# Altium PCB PCB1.PcbDoc
Units mil, origin at the board's own origin, x right, y up, seen from the top; angles counter-clockwise.
Board outline 1500 x 1600 mil, 8 copper layers (Top Layer, GND1, Signal Layer 1, POWER1, POWER2, Signal Layer 2, GND2, Bottom Layer), stack 66.301 mil thick; 43 components, 39 nets, 230 pads, 4 vias.
Unrouted connection lines stored in the file: 119.
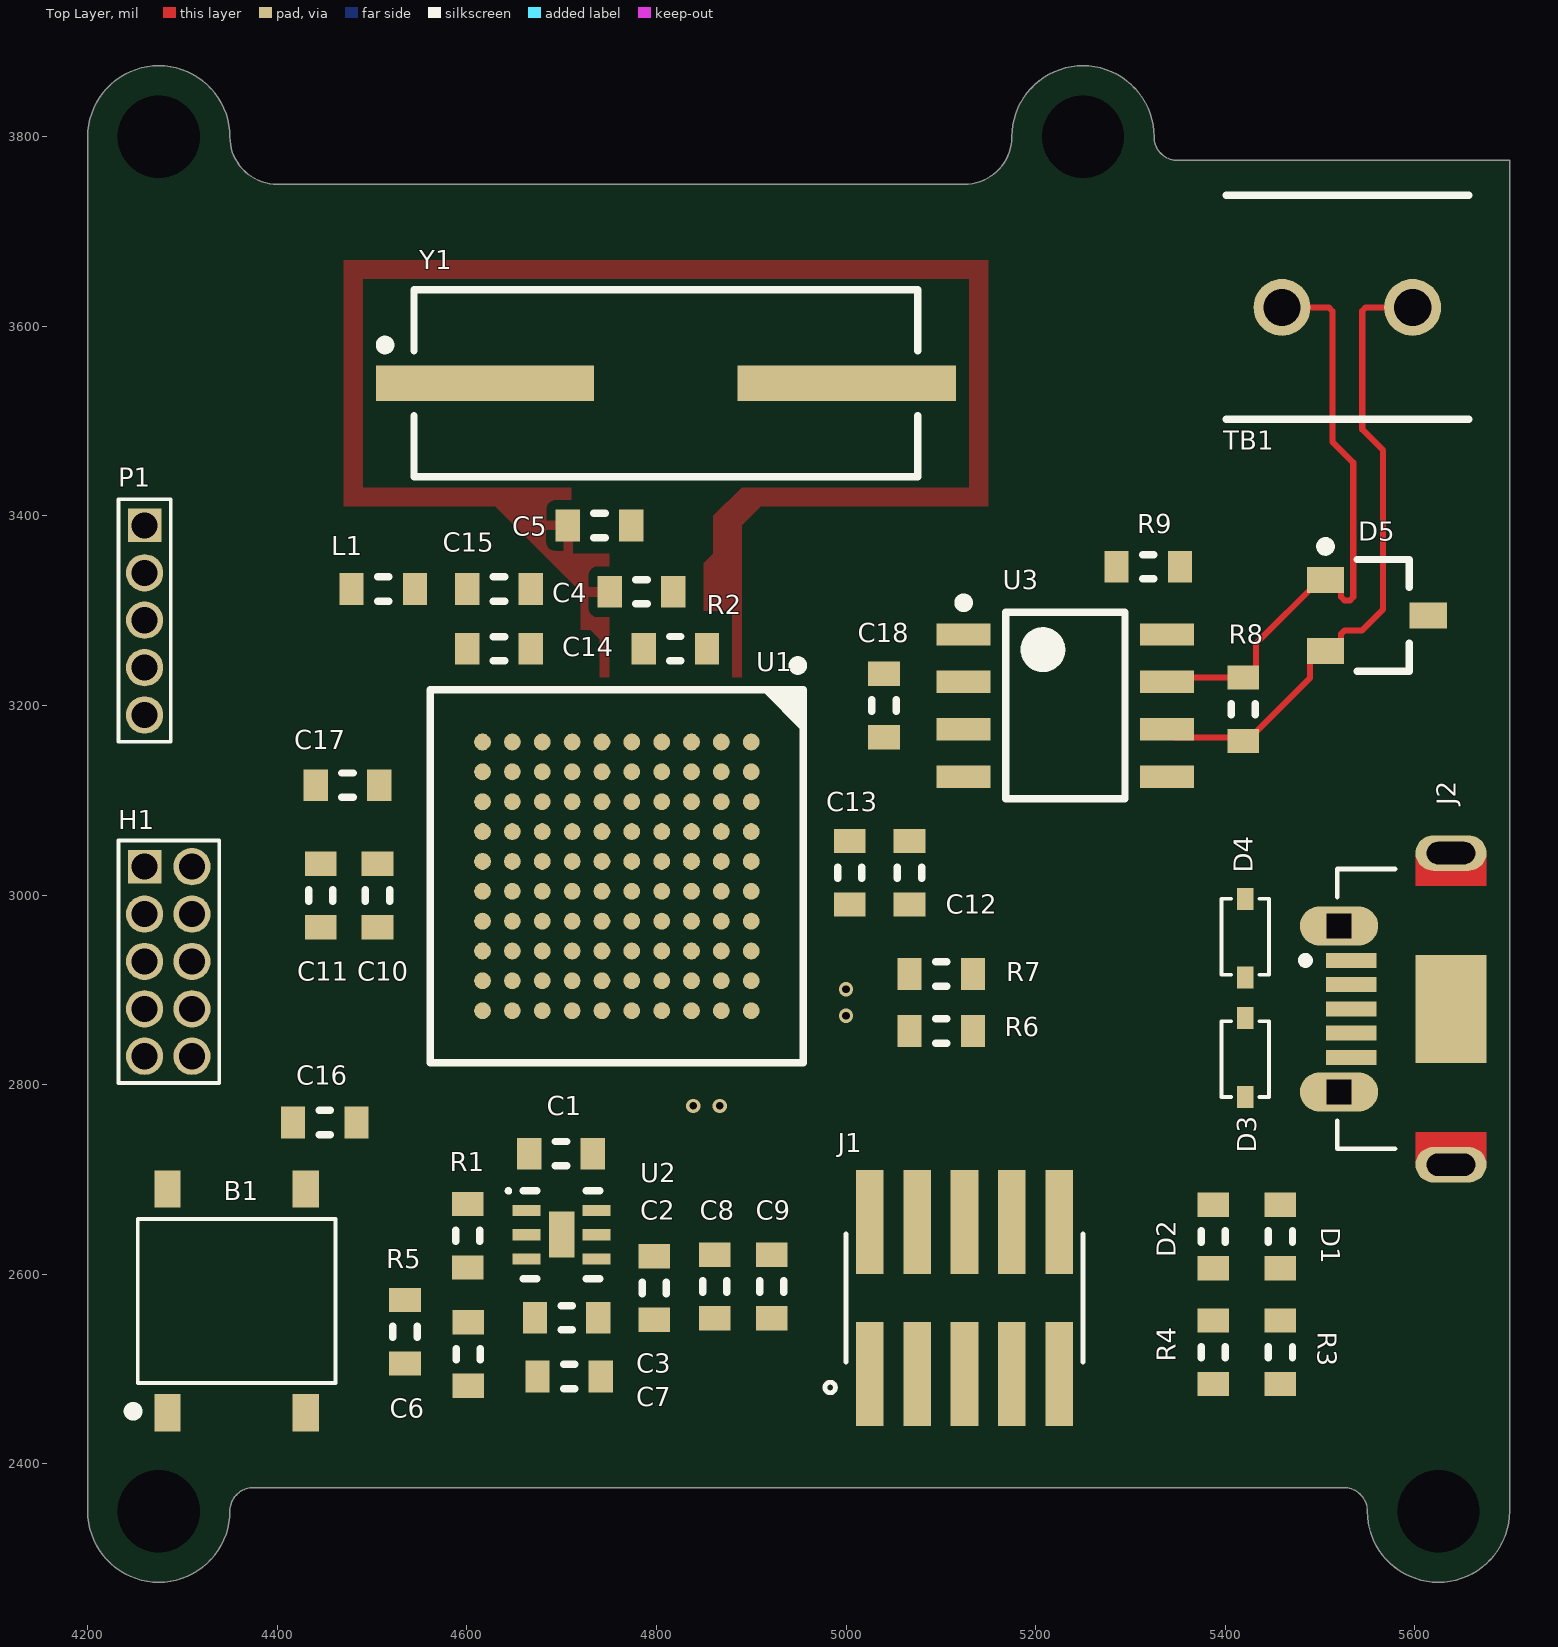
[diagram p0: Top Layer view]
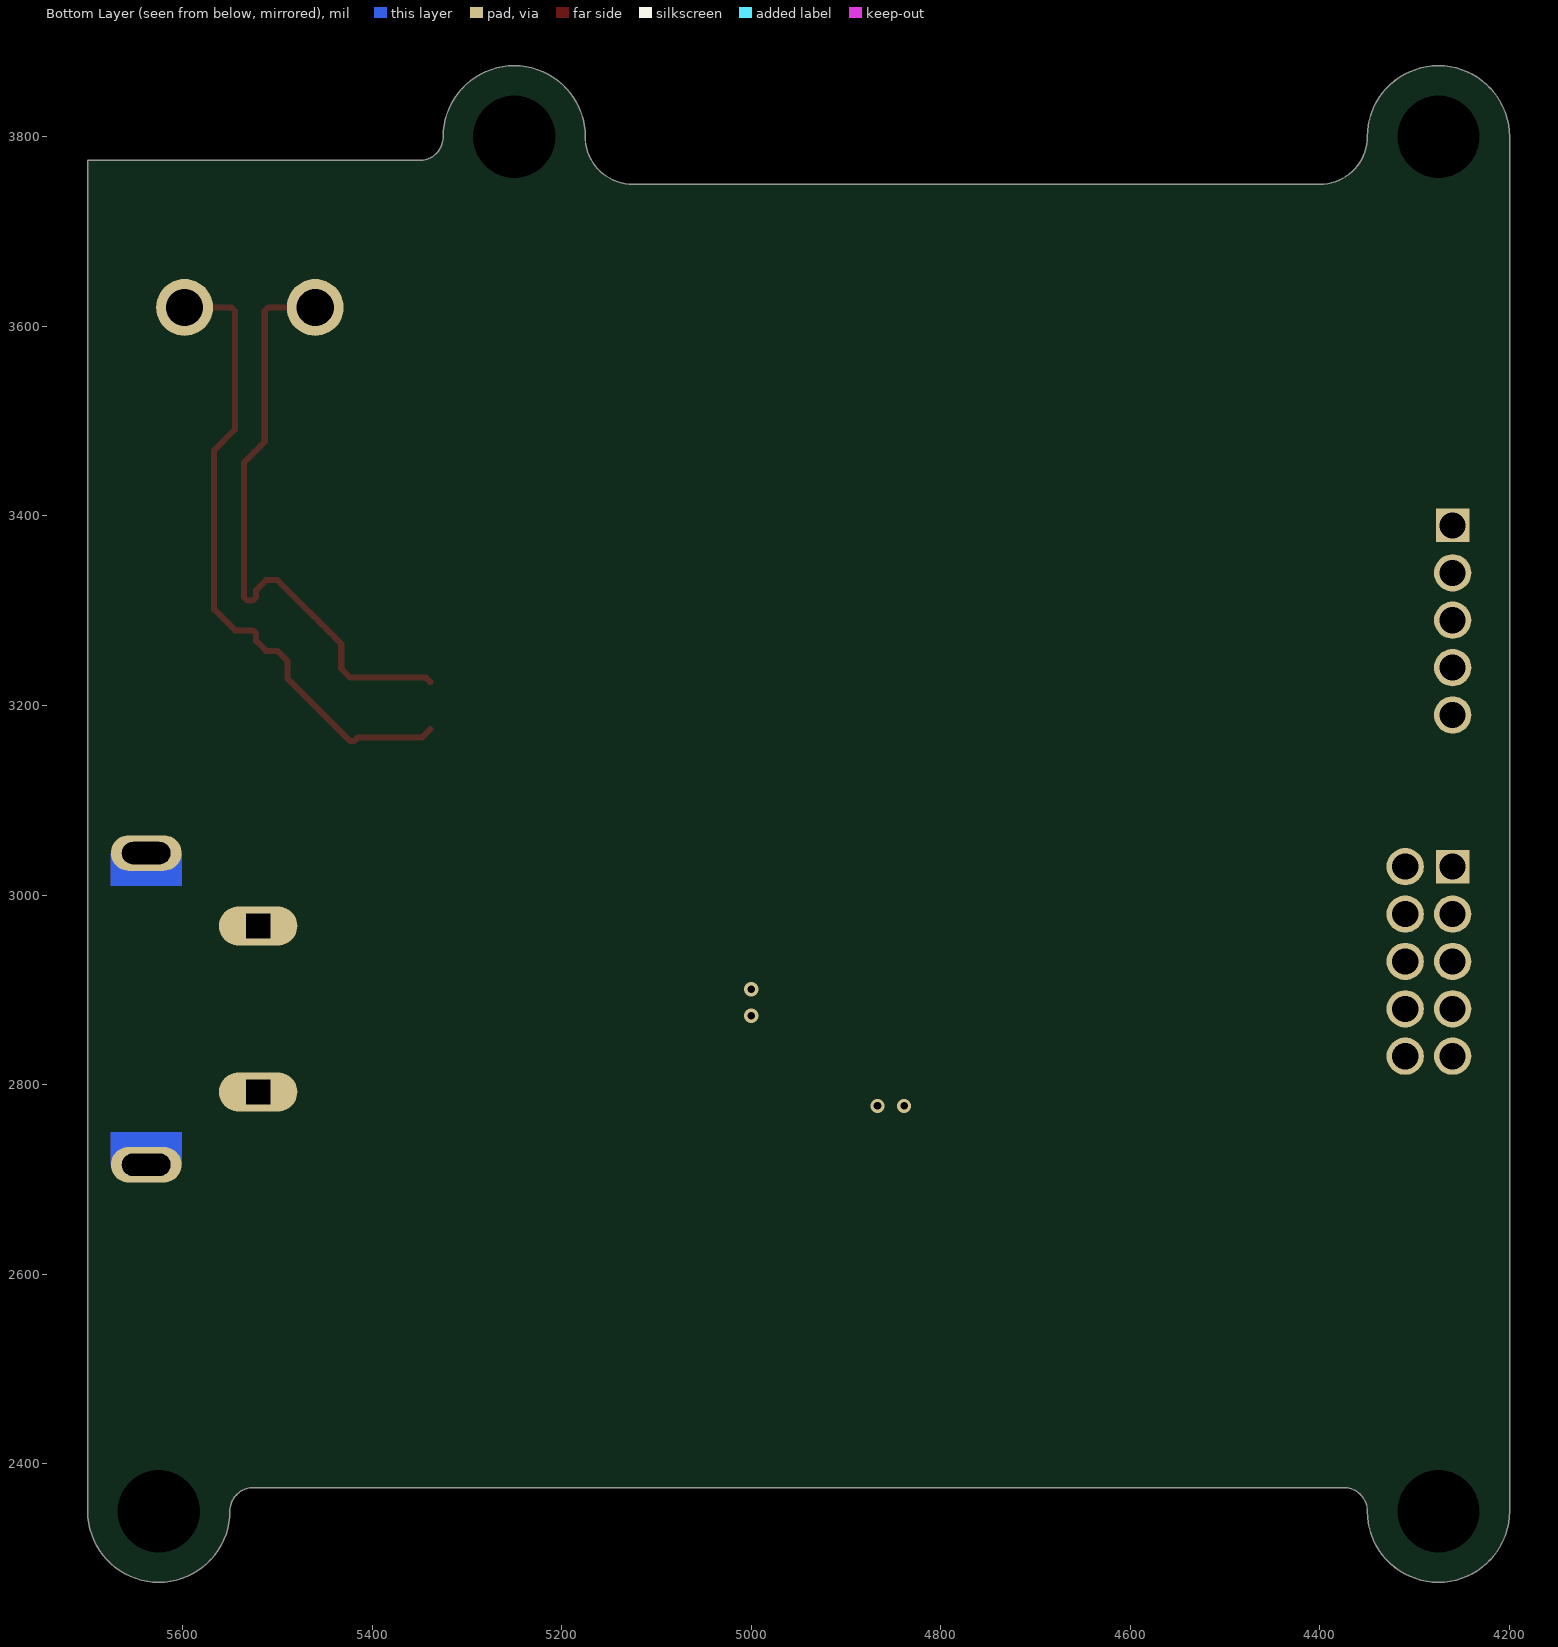
[diagram p1: Bottom Layer view, seen from below]
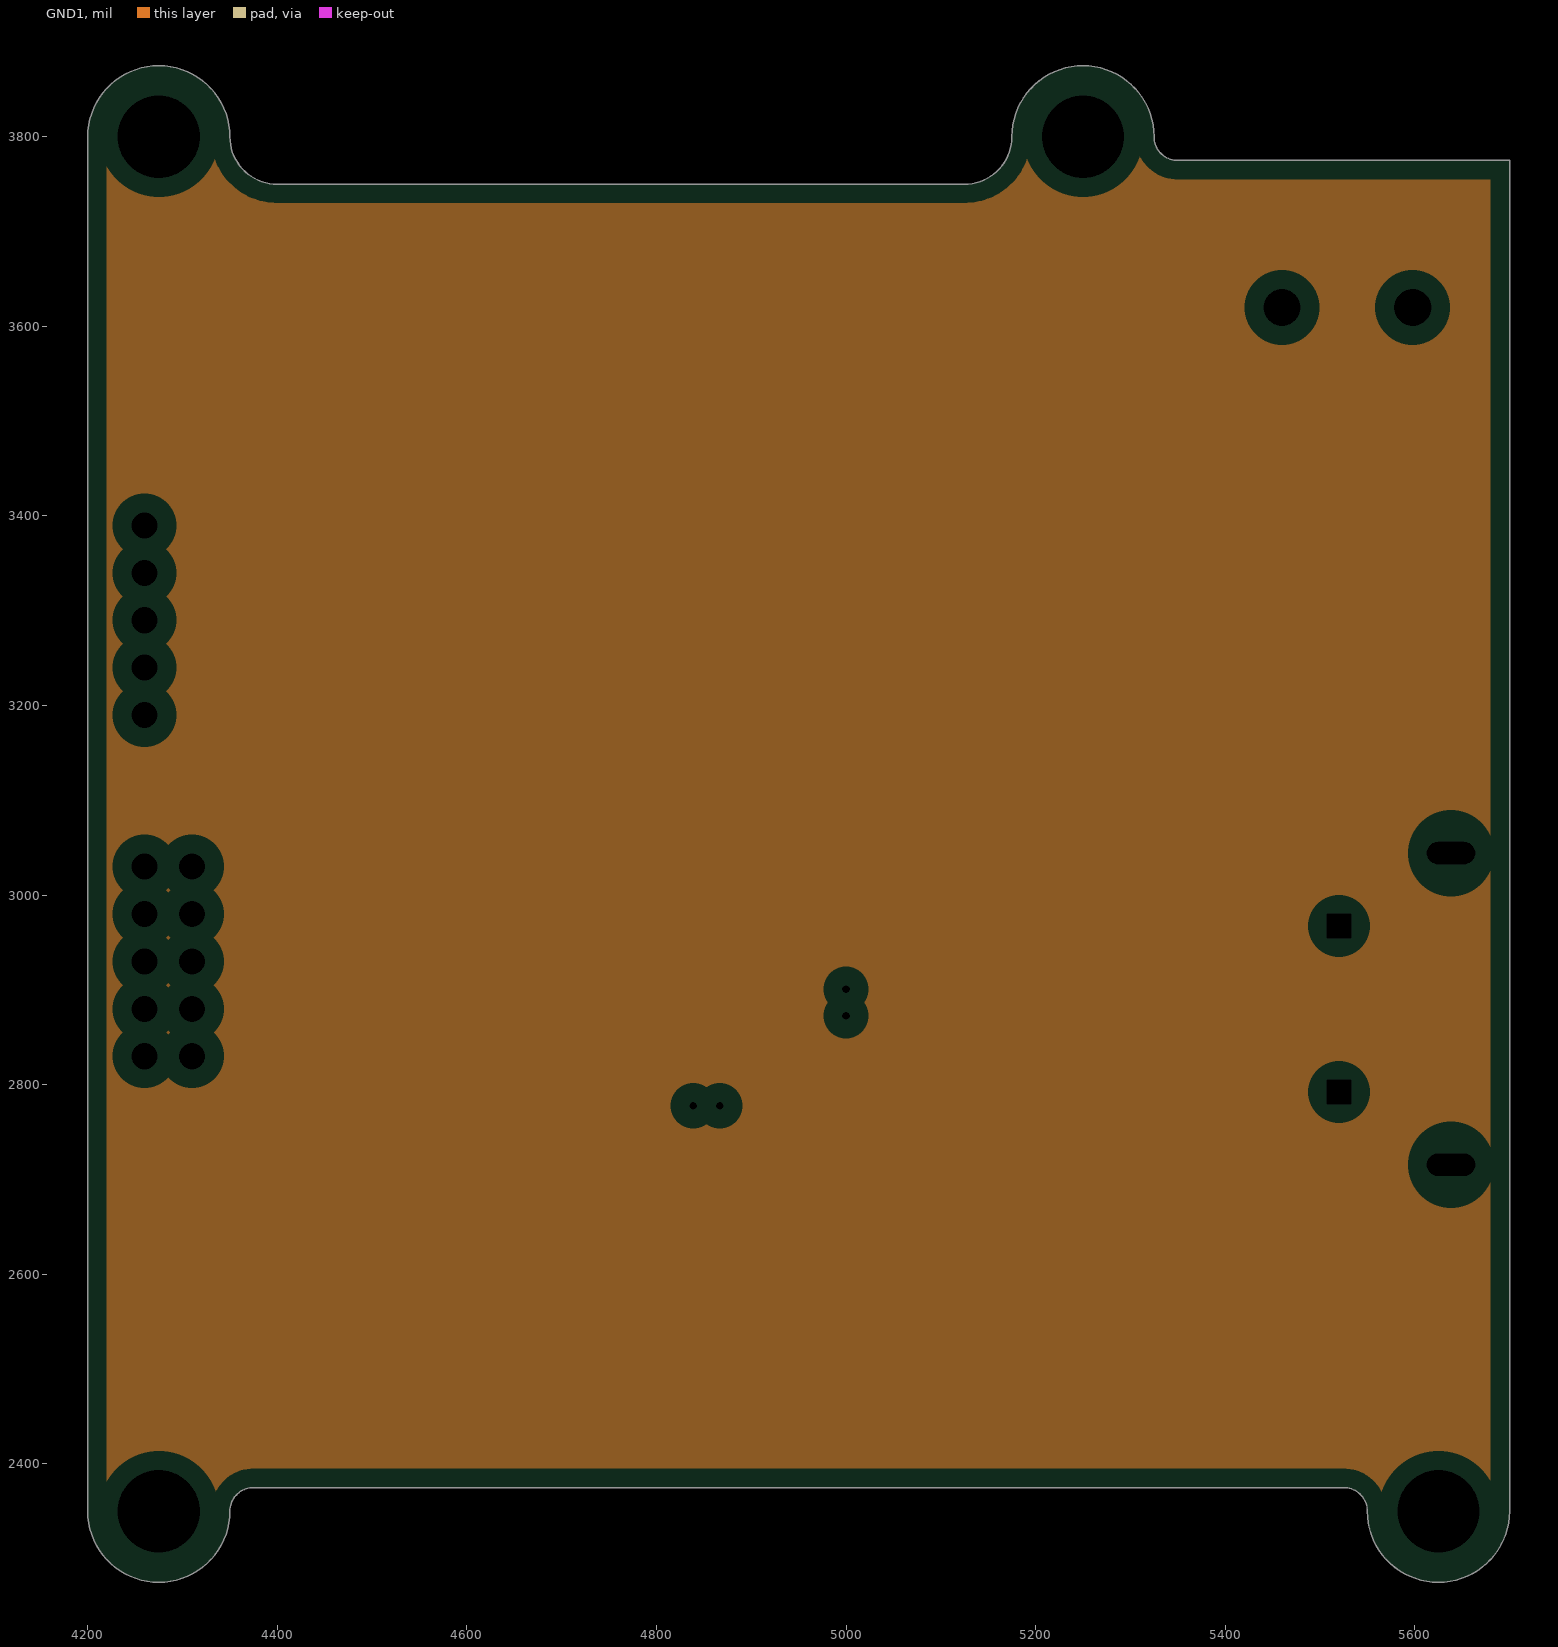
[diagram p2: GND1, clearances drawn from the general rule]
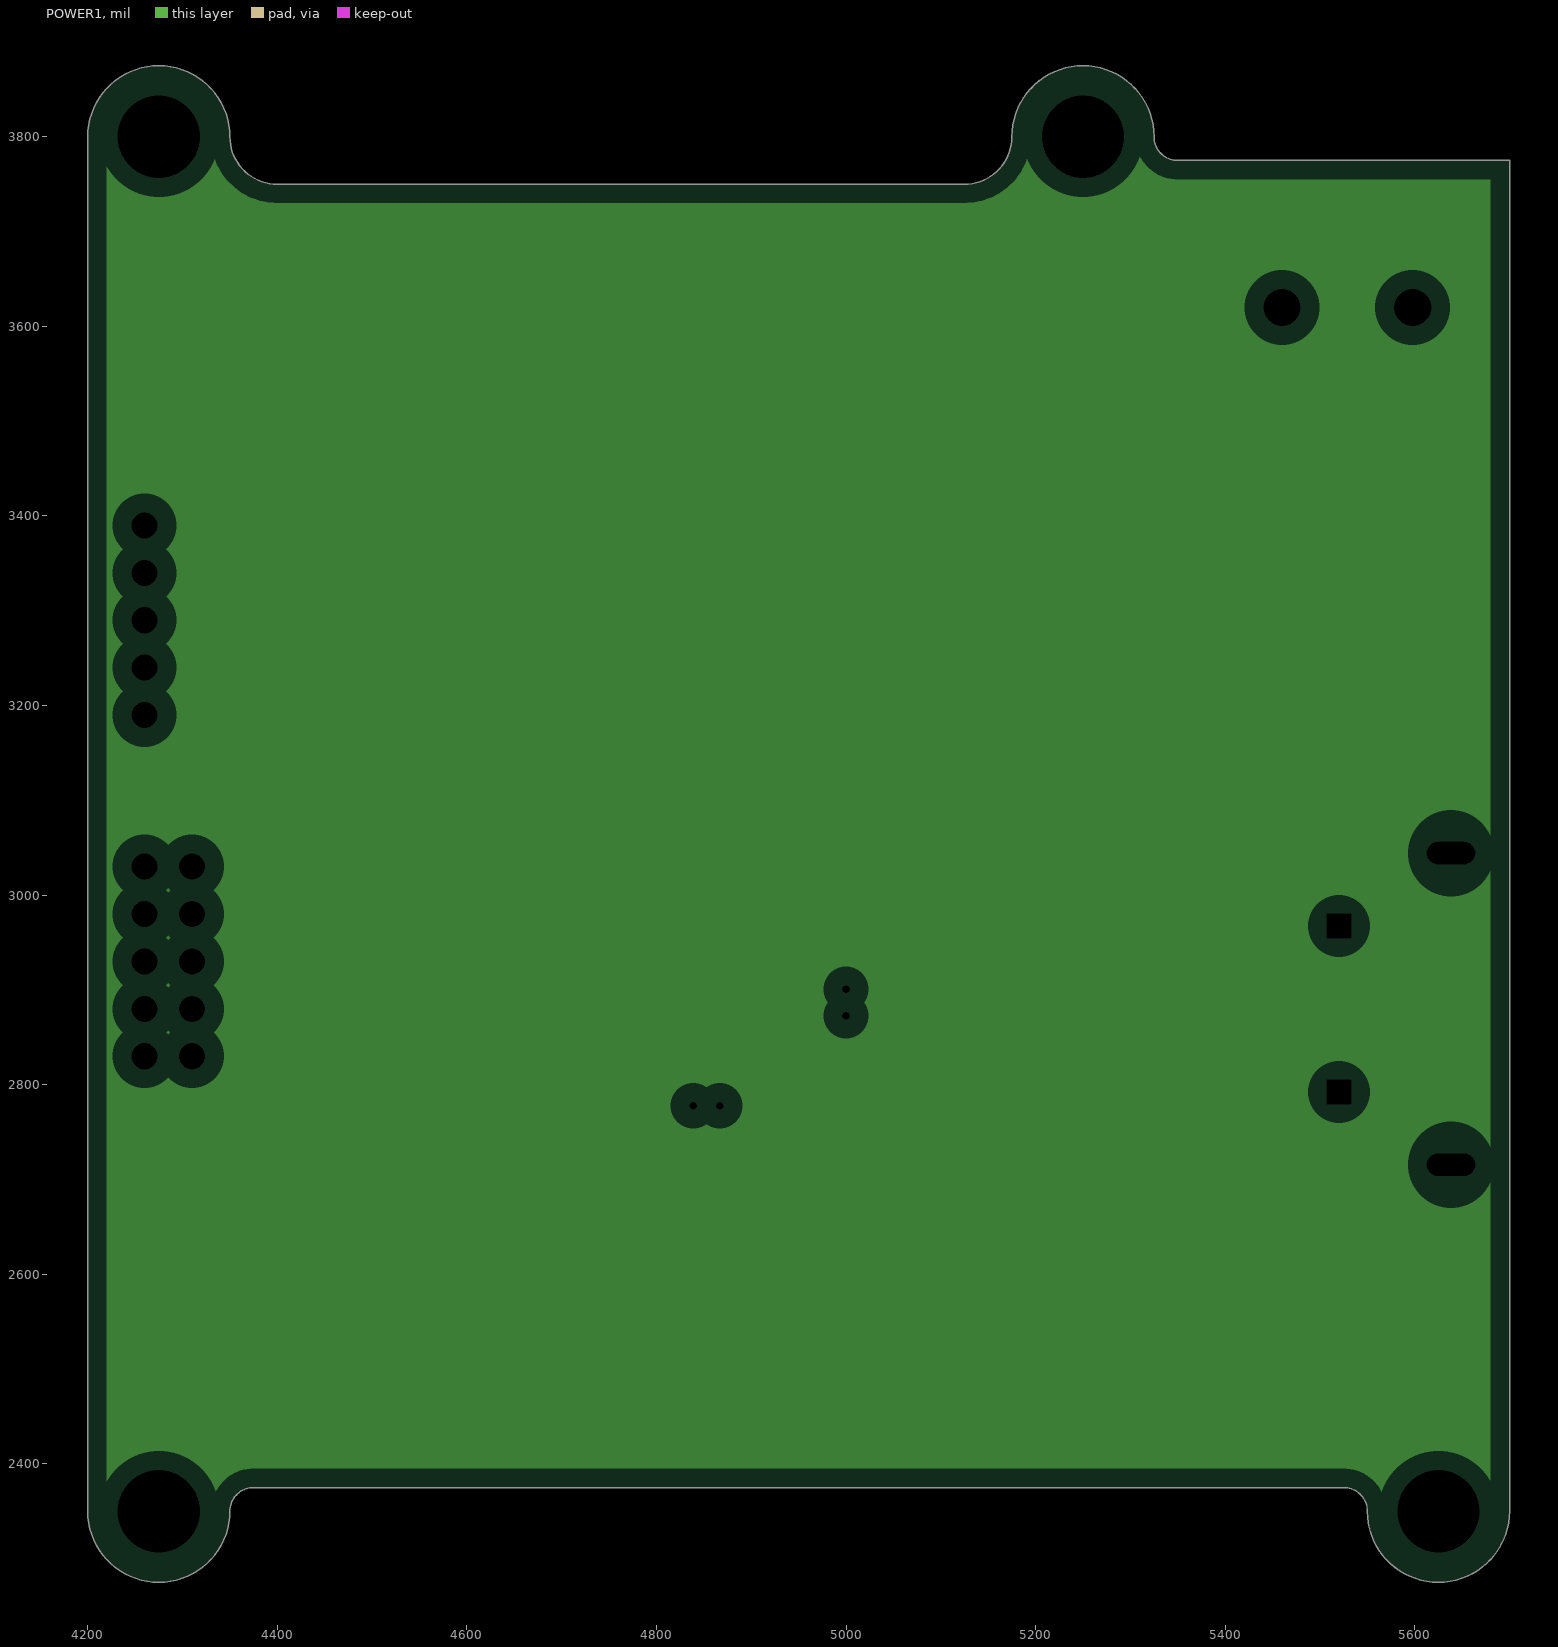
[diagram p3: POWER1, clearances drawn from the general rule]
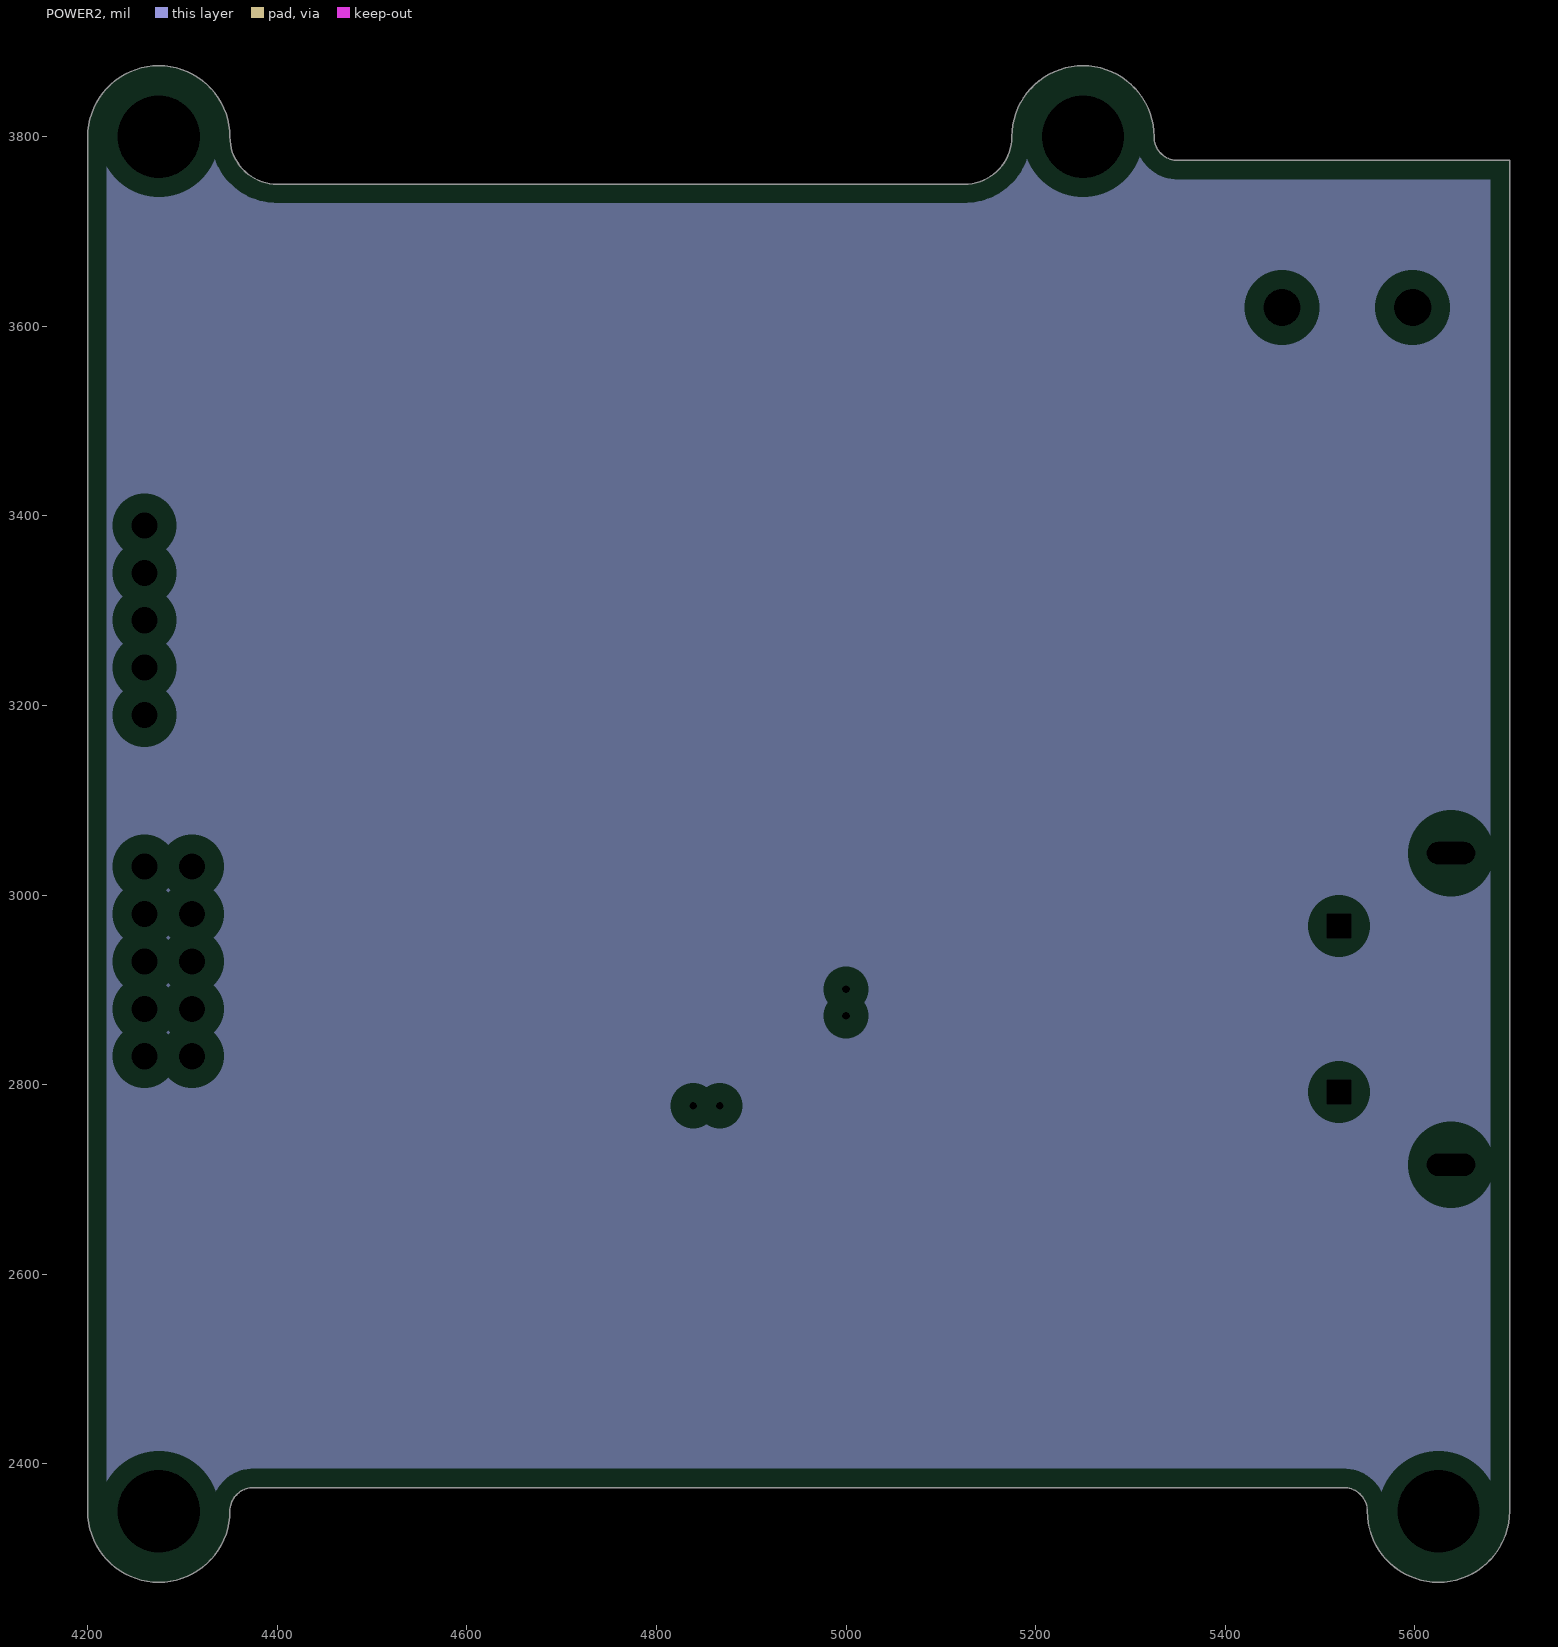
[diagram p4: POWER2, clearances drawn from the general rule]
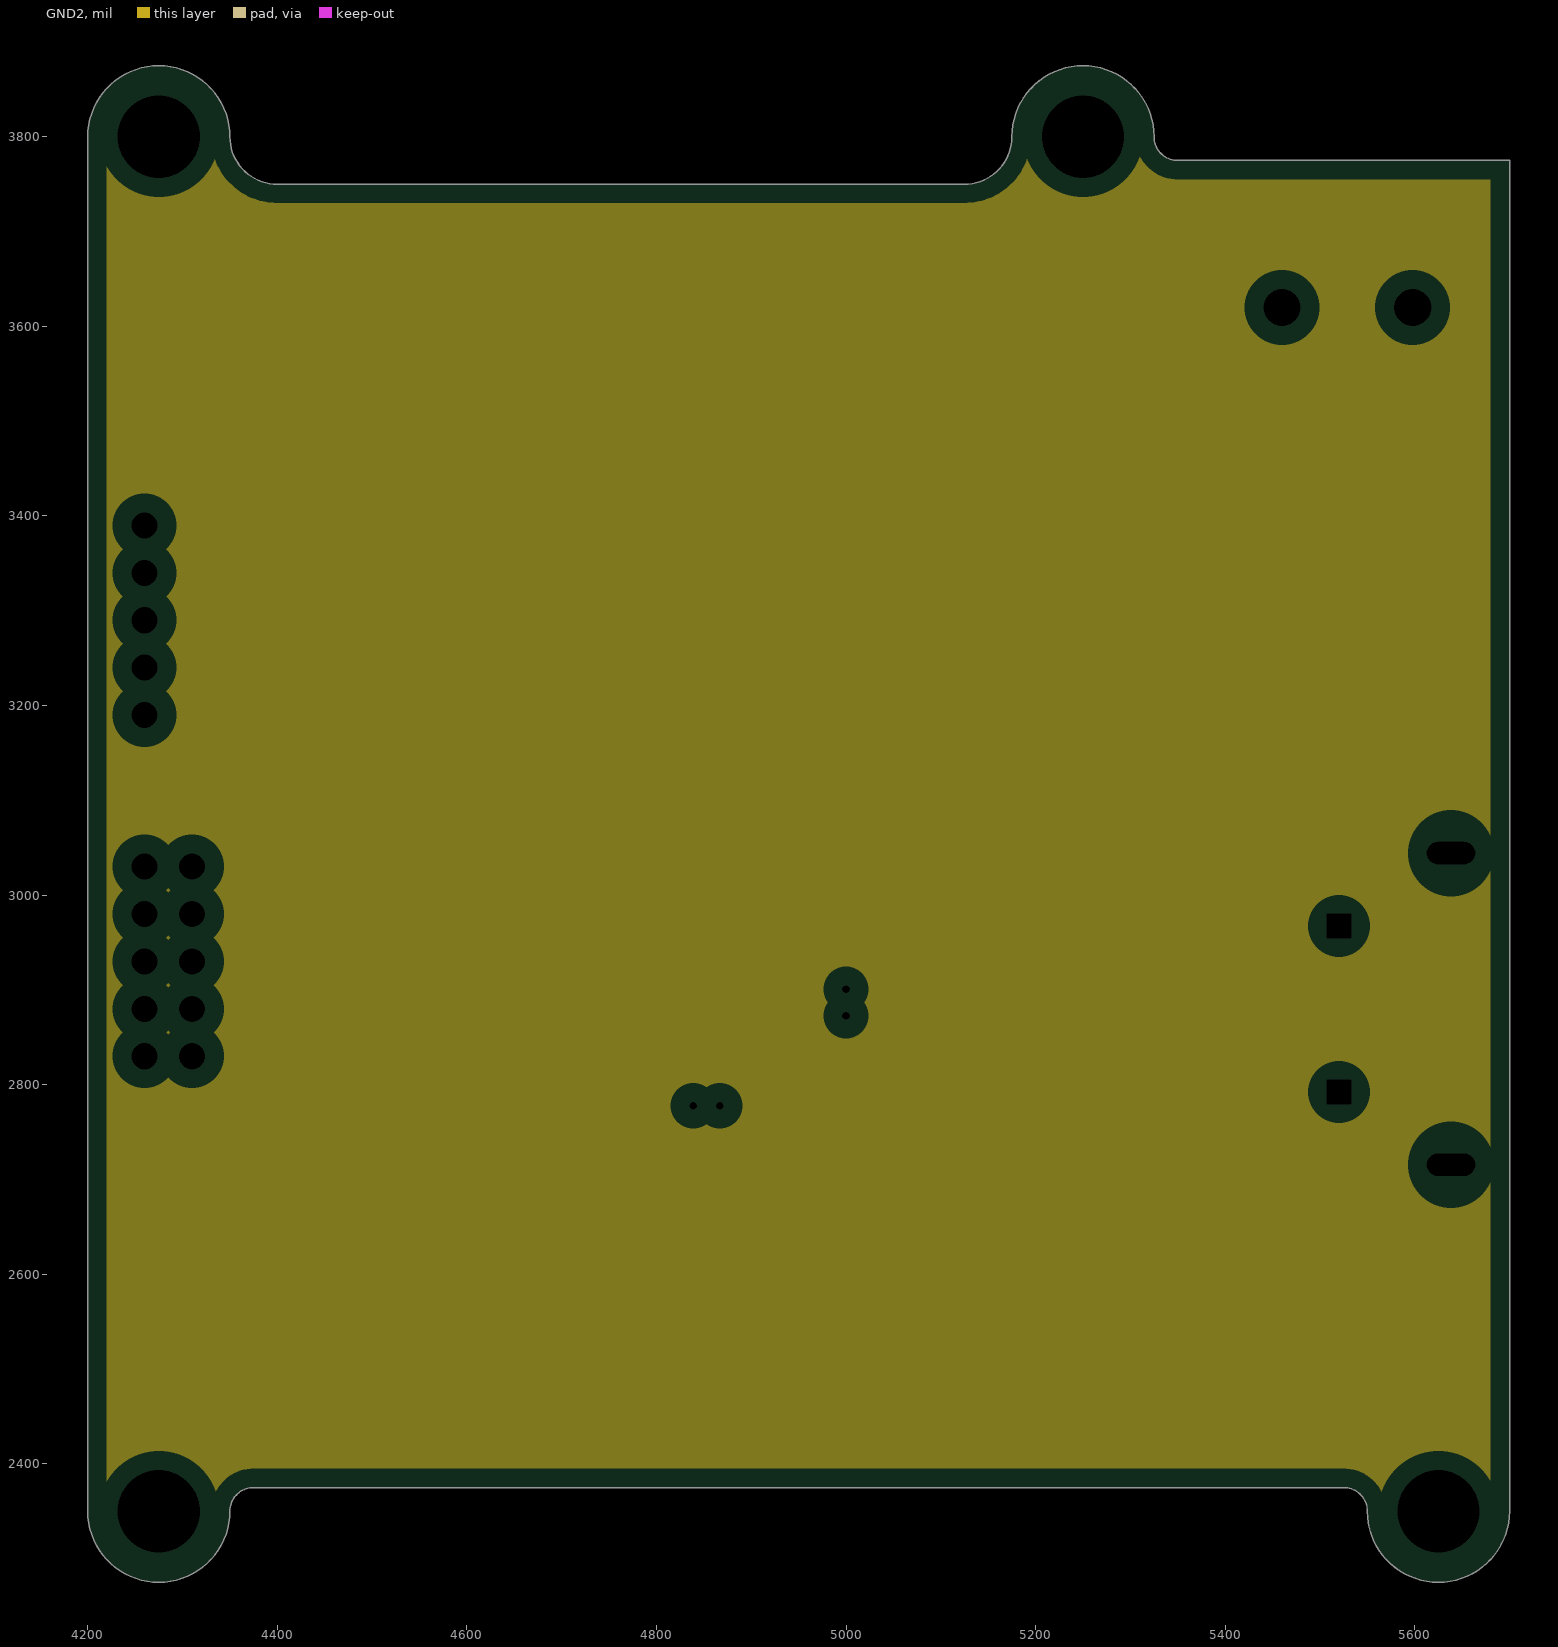
[diagram p5: GND2, clearances drawn from the general rule]

## Layer stack, top to bottom
Top Solder: solder mask 0.4, Solder Resist, Dk 3.5
Top Layer: signal copper 1.4
Dielectric 1: core 10, FR-4, Dk 4.2
GND1: plane copper 1.4169
Dielectric 4: prepreg 5, FR-4, Dk 4.2
Signal Layer 1: signal copper 1.4169
Dielectric 5: core 10, FR-4, Dk 4.2
POWER1: plane copper 1.4169
Dielectric 7: prepreg 5, Dk 4.2
POWER2: plane copper 1.4169
Dielectric 3: core 10, FR-4, Dk 4.2
Signal Layer 2: signal copper 1.4169
Dielectric 8: prepreg 5, Dk 4.2
GND2: plane copper 1.4169
Dielectric 6: core 10, Dk 4.2
Bottom Layer: signal copper 1.4
Bottom Solder: solder mask 0.4, Solder Resist, Dk 3.5

## Board outline
4200,2350 ccw(c4275,2350) 4275,2275 ccw(c4275,2350) 4350,2350 cw(c4375,2350) 4375,2375 5525,2375 cw(c5525,2350) 5550,2350 ccw(c5625,2350) 5625,2275 ccw(c5625,2350) 5700,2350 5700,3775 5350,3775 cw(c5350,3800) 5325,3800 ccw(c5250,3800) 5250,3875 ccw(c5250,3800) 5175,3800 cw(c5125,3800) 5125,3750 4400,3750 cw(c4400,3800) 4350,3800 ccw(c4275,3800) 4275,3875 ccw(c4275,3800) 4200,3800

## Design rules (kind name [scope] priority, off if disabled: settings)
Clearance Clearance_1 [All] p1: gap=3.94 ignorepadtopadclearanceinfootprint=TRUE
Clearance Clearance_BGA_Fanout [WithinRoom('BGA_Fanout')] p2: gap=3.94 ignorepadtopadclearanceinfootprint=FALSE
DiffPairsRouting DiffPair_USBDiffPairsRouting [InDifferentialPair('USBD')] p1: maxlimit=13 minlimit=13 mostfreqgap=13 toplayer_minwidth=8.9 toplayer_maxwidth=9.1 toplayer_prefwidth=9 midlayer1_minwidth=8.9 midlayer1_maxwidth=9.1 midlayer1_prefwidth=9 midlayer2_minwidth=8.9 midlayer2_maxwidth=9.1 midlayer2_prefwidth=9 bottomlayer_minwidth=8.9 bottomlayer_maxwidth=9.1 bottomlayer_prefwidth=9 maxuncoupledlength=100
DiffPairsRouting DiffPair_USBDiffPairsRouting_1 [InDifferentialPair('USBDWSD')] p2: maxlimit=13 minlimit=13 mostfreqgap=13 toplayer_minwidth=8.9 toplayer_maxwidth=9.1 toplayer_prefwidth=9 midlayer1_minwidth=8.9 midlayer1_maxwidth=9.1 midlayer1_prefwidth=9 midlayer2_minwidth=8.9 midlayer2_maxwidth=9.1 midlayer2_prefwidth=9 bottomlayer_minwidth=8.9 bottomlayer_maxwidth=9.1 bottomlayer_prefwidth=9 maxuncoupledlength=100
DiffPairsRouting DiffPair_CANDiffPairsRouting [InDifferentialPair('CAN')] p3: maxlimit=35 minlimit=20 mostfreqgap=25 toplayer_minwidth=6.43 toplayer_maxwidth=6.43 toplayer_prefwidth=6.43 midlayer1_minwidth=6.43 midlayer1_maxwidth=6.43 midlayer1_prefwidth=6.43 midlayer2_minwidth=6.43 midlayer2_maxwidth=6.43 midlayer2_prefwidth=6.43 bottomlayer_minwidth=6.43 bottomlayer_maxwidth=6.43 bottomlayer_prefwidth=6.43 maxuncoupledlength=500
DiffPairsRouting [All] p4: maxlimit=10 minlimit=10 mostfreqgap=10 toplayer_minwidth=15 toplayer_maxwidth=15 toplayer_prefwidth=15 midlayer1_minwidth=15 midlayer1_maxwidth=15 midlayer1_prefwidth=15 midlayer2_minwidth=15 midlayer2_maxwidth=15 midlayer2_prefwidth=15 bottomlayer_minwidth=15 bottomlayer_maxwidth=15 bottomlayer_prefwidth=15 maxuncoupledlength=500
FanoutControl Fanout_BGA [IsBGA] p1: bgadir=Out bgaviamode=Centered fanoutstyle=BGA fanoutdirection=Alternating viagrid=1 // Fanout_BGA (Default Rule)
MatchedLengths DiffPair_USBMatchedLengths [InDifferentialPair ('USBD')] p1: tolerance=1000 checknetsindiffpair=FALSE checkdiffpairvsdiffpair=TRUE checkxsignals=TRUE checkothers=TRUE
MatchedLengths DiffPair_CANMatchedLengths [InDifferentialPair ('CAN')] p2: tolerance=1000 checknetsindiffpair=FALSE checkdiffpairvsdiffpair=TRUE checkxsignals=TRUE checkothers=TRUE
MatchedLengths [InDifferentialPair ('CAN')] p3: tolerance=1000 checknetsindiffpair=FALSE checkdiffpairvsdiffpair=TRUE checkxsignals=TRUE checkothers=TRUE
MinimumSolderMaskSliver [All] p1 off: minsoldermaskwidth=10
PlaneClearance [All] p1: clearance=20
PlaneConnect [All] p1: planeconnectstyle=Relief reliefexpansion=20 reliefentries=4 reliefconductorwidth=10 reliefairgap=10
PolygonConnect [All] p1: connectstyle=Relief reliefconductorwidth=10 reliefentries=4 polygonreliefangle="90 Angle" airgapwidth=10
RoutingVias RoutingVias_USB [InDifferentialPair ('USBD') AND InDifferentialPair('USBDWSD')] p1: holewidth=8 width=15 viastyle="Through Hole" minholewidth=8 minwidth=15 maxholewidth=8 maxwidth=15
RoutingVias RoutingVias_1 [All] p2: holewidth=8 width=15 viastyle="Through Hole" minholewidth=8 minwidth=15 maxholewidth=8 maxwidth=15
RoutingVias RoutingVias_BGA_Fanout [WithinRoom('BGA_Fanout')] p3: holewidth=9.84 width=18.9 viastyle="Through Hole" minholewidth=9.84 minwidth=18.9 maxholewidth=9.84 maxwidth=18.9
SilkToSilkClearance [All] p1 off: silktosilkclearance=3.94
SilkToSolderMaskClearance [IsPad] p1 off: minsilkscreentomaskgap=3.94 clearancetoexposedcopper=TRUE
SolderMaskExpansion [All] p1: expansion=4
Width Width_BGA_Fanout [WithinRoom('BGA_Fanout')] p1: maxlimit=3 minlimit=3 preferedwidth=3
Width Width_1 [All] p2: maxlimit=6 minlimit=3 preferedwidth=5
23 further rules are at their usual default settings.

## Classes and differential pairs
component class "Room Definition 1": U1
differential pair USBDWSD: +USBDWSD_P -USBDWSD_N
differential pair USBD: +USBD_P -USBD_N
differential pair CAN: +CAN_P -CAN_N

## Components (designator, comment, footprint, x,y, rotation, side; value= is the part's Value field where it differs from the comment)
B1 "PTS526 SPST" "PTS526 SPST" 4252.83,2729.37 r90 top
C1 "Cap" 0603 4699.37,2727.24 r180 top value=22nF
C2 "Cap" 0603 4797.8,2585.51 r270 top value=1uF/X7R
C3 "Cap" 0603 4705.28,2554.02 r0 top value=1uF/X7R
C4 "Cap" 0603 4784.33,3320 r0 top value=20pF
C5 "Cap" 0603 4740,3390 r0 top value=20pF
C6 "Cap" 0603 4601.57,2515.75 r270 top value=1uF
C7 "Cap" 0603 4707.87,2492.13 r0 top value=1uF
C8 "Cap" 0603 4861.57,2587.09 r270 top value=10uF
C9 "Cap" 0603 4921.57,2587.09 r270 top value=10uF
C10 "Cap" 0603 4505.83,2999.53 r90 top value=0.1uF
C11 "Cap" 0603 4445.83,2999.53 r90 top value=0.1uF
C12 "Cap" 0603 5066.93,3023.62 r270 top value=0.1uF
C13 "Cap" 0603 5003.94,3023.62 r270 top value=0.1uF
C14 "Cap" 0603 4633.86,3259.84 r0 top value=1uF
C15 "Cap" 0603 4633.86,3322.83 r0 top value=0.1uF
C16 "Cap" 0603 4450,2760 r0 top value=1uF
C17 "Cap" 0603 4474,3116 r0 top value=10nF
C18 "Cap" 0603 5040,3200 r90 top value=0.1uF
D1 "RED" 0603 5458.27,2639.76 r270 top
D2 "RED" 0603 5387.4,2639.76 r270 top
D3 "TVS" SOD323 5421.26,2787.01 r270 top
D4 "TVS" SOD323 5421.26,2996.06 r90 top
D5 "ESDCAN24" SOT-23 5560,3295 r0 top
H1 "IOs" "5X2 HEADER 1.27mm" 4260,3030 r270 top
J1 "JTAG" SAMTEC_FTSH-105-01-L-DV-K 5125,2575 r0 top
J2 "47590-0001" MOLEX_47590-0001 5638.27,2879.92 r90 top
L1 "Inductor" 0603 4511.81,3322.83 r0 top value=Bead
P1 "USART" "5 Pin header 1.27mm" 4260,3390 r270 top
R1 "Res1" 0603 4600.94,2640.63 r90 top value=1K
R2 "Res1" 0603 4820,3260 r0 top value=1M
R3 "Res1" 0603 5458.27,2517.72 r270 top value=510R
R4 "Res1" 0603 5387.4,2517.72 r270 top value=510R
R5 "Res1" 0603 4534.65,2539.37 r90 top value=10K
R6 "Res1" 0603 5100.43,2856.65 r0 top value=22R
R7 "Res1" 0603 5100.43,2916.65 r0 top value=22R
R8 "Res1" 0603 5419,3196 r90 top value=120R
R9 "Res1" 0603 5318.9,3346.46 r180 top value=22R
TB1 "CAN BUS" "Terminal Block 3.5mm" 5460,3620 r0 top
U1 "STM32F103VBH6" "LFBGA100 10x10" 4758.27,3019.76 r270 top
U2 "RT9193" WDFN-6L 4700,2641.73 r0 top
U3 "SN65HVD230" "SOIC 8 1.27mm" 5231.34,3199.92 r0 top
Y1 "8MHz" HC-49/US 4810,3540 r0 top

## Footprints (in the part's own frame and the unit in brackets; to place one, negate y for a bottom-side part, rotate by r counter-clockwise, add the part's x,y. Pads: shape width x height; smd on the part's side, far side on the other; paste and mask are expansions set on the pad)
"5 Pin header 1.27mm" [mm]
  rect 0.9x0.9 hole 0.7 mask+0.06: 1(0,0)
  round 1 hole 0.7 mask+0.06: 2(1.27,0) 3(2.54,0) 4(3.81,0) 5(5.08,0)
  silkscreen extent -0.7,-0.7 5.8,0.7, body extent -0.86,-0.86 5.94,0.86, height 1.27
"5X2 HEADER 1.27mm" [mm]
  rect 0.9x0.9 hole 0.7 mask+0.06: 1(0,0)
  round 1 hole 0.7 mask+0.06: 2(0,1.27) 3(1.27,0) 4(1.27,1.27) 5(2.54,0) 6(2.54,1.27) 7(3.81,0) 8(3.81,1.27) 9(5.08,0) 10(5.08,1.27)
  silkscreen extent -0.7,-0.7 5.8,2, body extent -0.86,-0.86 5.94,2.13, height 1.27
0603 [mm]
  rect 0.65x0.85 smd: 1(-0.85,0) 2(0.85,0)
  silkscreen extent -0.15,-0.33 0.15,0.33, body extent -1.47,-0.73 1.47,0.73, height 0.45
HC-49/US [mm] "SODFL, 2-Leads, Body 5.00x15.00mm, IPC Medium Density"
  rect 5.85x0.95 smd: 1(-4.85,0) 2(4.85,0)
  silkscreen extent -7.65,-2.5 6.75,2.5, body extent -7.95,-2.67 7.95,2.67, height 4.5
"LFBGA100 10x10" [mm] "BGA, 100-Leads, Body 10.00x10.00mmx1.70mm, Pitch 0.80mm"
  round 0.45 smd: A1(-3.6,3.6) A2(-2.8,3.6) A3(-2,3.6) A4(-1.2,3.6) A5(-0.4,3.6) A6(0.4,3.6) A7(1.2,3.6) A8(2,3.6) A9(2.8,3.6) A10(3.6,3.6) B1(-3.6,2.8) B2(-2.8,2.8) B3(-2,2.8) B4(-1.2,2.8) B5(-0.4,2.8) B6(0.4,2.8) B7(1.2,2.8) B8(2,2.8) B9(2.8,2.8) B10(3.6,2.8) C1(-3.6,2) C2(-2.8,2) C3(-2,2) C4(-1.2,2) C5(-0.4,2) C6(0.4,2) C7(1.2,2) C8(2,2) C9(2.8,2) C10(3.6,2) D1(-3.6,1.2) D2(-2.8,1.2) D3(-2,1.2) D4(-1.2,1.2) D5(-0.4,1.2) D6(0.4,1.2) D7(1.2,1.2) D8(2,1.2) D9(2.8,1.2) D10(3.6,1.2) E1(-3.6,0.4) E2(-2.8,0.4) E3(-2,0.4) E4(-1.2,0.4) E5(-0.4,0.4) E6(0.4,0.4) E7(1.2,0.4) E8(2,0.4) E9(2.8,0.4) E10(3.6,0.4) F1(-3.6,-0.4) F2(-2.8,-0.4) F3(-2,-0.4) F4(-1.2,-0.4) F5(-0.4,-0.4) F6(0.4,-0.4) F7(1.2,-0.4) F8(2,-0.4) F9(2.8,-0.4) F10(3.6,-0.4) G1(-3.6,-1.2) G2(-2.8,-1.2) G3(-2,-1.2) G4(-1.2,-1.2) G5(-0.4,-1.2) G6(0.4,-1.2) G7(1.2,-1.2) G8(2,-1.2) G9(2.8,-1.2) G10(3.6,-1.2) H1(-3.6,-2) H2(-2.8,-2) H3(-2,-2) H4(-1.2,-2) H5(-0.4,-2) H6(0.4,-2) H7(1.2,-2) H8(2,-2) H9(2.8,-2) H10(3.6,-2) J1(-3.6,-2.8) J2(-2.8,-2.8) J3(-2,-2.8) J4(-1.2,-2.8) J5(-0.4,-2.8) J6(0.4,-2.8) J7(1.2,-2.8) J8(2,-2.8) J9(2.8,-2.8) J10(3.6,-2.8) K1(-3.6,-3.6) K2(-2.8,-3.6) K3(-2,-3.6) K4(-1.2,-3.6) K5(-0.4,-3.6) K6(0.4,-3.6) K7(1.2,-3.6) K8(2,-3.6) K9(2.8,-3.6) K10(3.6,-3.6)
  silkscreen extent -5.77,-5 5,5, body extent -5.9,-5.28 5.27,5.27, height 1.7
MOLEX_47590-0001 [mm]
  rect 0.4x1.35 smd: 1(1.3,2.675) 2(0.65,2.675) 3(0,2.675) 4(-0.65,2.675) 5(-1.3,2.675)
  oval 1.05x2.1 hole 0.65 square: SH1(-2.225,3) SH2(2.225,3)
  oval 0.95x1.9 hole 0.6 slot 1.3 at 90 deg: SH3(-4.175,0) SH4(4.175,0)
  rect 2.9x1.9 smd: SH5(0,0)
  Top Layer region: -3.3,-0.951 -4.177,-0.951 -4.177,0.95 -3.3,0.95
  Top Layer region: 4.175,-0.95 3.3,-0.95 3.3,0.95 4.175,0.95
  Bottom Layer region: -3.3,-0.95 -4.177,-0.95 -4.177,0.95 -3.3,0.95
  Bottom Layer region: 4.175,-0.951 3.305,-0.951 3.305,0.95 4.175,0.95
  silkscreen extent -3.75,1.5 3.75,4, body extent -4.98,-2.42 8.31,4.33, height 1.27
"PTS526 SPST" [mm]
  rect 1x0.7 smd: 1(-7,-0.8) 1(-7,-0.8) 2(-1,-0.8) 3(-7,-4.5) 4(-1,-4.5)
  silkscreen extent -7.08,-5.3 -1.8,0.25, body extent -7.6,-5.35 -0.4,0.38, height 1.27
SAMTEC_FTSH-105-01-L-DV-K [mm]
  rect 0.74x2.79 smd: 1(-2.54,-2.035) 2(-2.54,2.035) 3(-1.27,-2.035) 4(-1.27,2.035) 5(0,-2.035) 6(0,2.035) 7(1.27,-2.035) 8(1.27,2.035) 9(2.54,-2.035) 10(2.54,2.035)
  silkscreen extent -3.74,-2.54 3.17,1.72, body extent -3.8,-3.73 3.45,3.73, height 1.27
SOD323 [mm] "TVS Diode"
  rect 0.59x0.45 smd: 1(-2.11,0) 2(0,0)
  silkscreen extent -2.03,-0.64 0,0.64, body extent -2.51,-0.68 0.4,0.68, height 1.27
"SOIC 8 1.27mm" [mm] "SOIC, 8-Leads, Body 4.91x3.90mm, Pitch 1.27mm, IPC Medium Density"
  rect 1.45x0.6 smd: 1(-2.725,1.905) 2(-2.725,0.635) 3(-2.725,-0.635) 4(-2.725,-1.905) 5(2.725,-1.905) 6(2.725,-0.635) 7(2.725,0.635) 8(2.725,1.905)
  silkscreen extent -2.85,-2.5 1.6,2.88, body extent -3.73,-2.78 3.73,3.01, height 2.65
SOT-23 [mm] "SOT23, 3-Leads, Body 2.90x2.80mm, Pitch 0.95mm, IPC Medium Density"
  rect 1x0.7 smd: 1(-1.375,0.95) 2(-1.375,-0.95) 3(1.375,0)
  silkscreen extent -1.5,-1.5 0.87,1.97, body extent -2.13,-1.78 2.13,2.1, height 1.45
"Terminal Block 3.5mm" [mil]
  round 60 hole 39.37: 1(0,0) 2(137.8,0)
  silkscreen extent -59,-118 197,118, body extent -63,-122 201,122, height 50
WDFN-6L [mm] "SON, 6-Leads, Body 2.00x2.00mm, Pitch 0.65mm, Thermal Pad 1.23x0.68mm, IPC Medium Density"
  rect 0.75x0.3 smd: 1(-0.94,0.65) 2(-0.94,0) 3(-0.94,-0.65) 4(0.94,-0.65) 5(0.94,0) 6(0.94,0.65)
  rect 0.68x1.23 smd: 7(0,0)
  silkscreen extent -1.47,-1.18 1.02,1.22, body extent -1.61,-1.33 1.61,1.33, height 0.8

## Part data
C1 C2 C3 C4 C5 C6 C7 C8 C9 C10 C11 C12 C13 C14 C15 C16 C17 C18: "Capacitor", LatestRevisionDate=17-Jul-2002, LatestRevisionNote="Re-released for DXP Platform.", PackageDescription="Radial Cap, Thru-Hole; 2 Leads; 0.3 in Pin Spacing", PackageReference=RAD-0.3, Published=8-Jun-2000, Publisher="Altium Limited"
D1 D2: library part LED2, "Typical RED, GREEN, YELLOW, AMBER GaAs LED", LatestRevisionDate=17-Jul-2002, LatestRevisionNote="Re-released for DXP Platform.", PackageDescription="SM LED; 2 Flat Leads", PackageReference=3.2X1.6X1.1, PackageVersion=Feb-2002, Published=8-Jun-2000, Publisher="Altium Limited"
H1: library part "Header 5X2", "Header, 5-Pin, Dual row", LatestRevisionDate=17-Jul-2002, LatestRevisionNote="Re-released for DXP Platform.", Publisher="Altium Limited"
J1: library part FTSH-105-01-L-DV-K, "Connector Header Surface Mount 10 position 0.050 _1.27mm_", Package="TSSOP-20 Texas Instruments", Availability=Unavailable, MF=Samtec, MP=FTSH-105-01-L-DV-K, Price=None, SnapEDA_Link=https://www.snapeda.com/parts/FTSH-105-01-L-DV-K/Samtec%20Inc./view-part/37894/?ref=snap
J2: "USB - micro AB Receptacle Connector 5 Position Surface Mount, Right Angle; Through Hole", Package=None, Availability=Unavailable, MF=Molex, MP=47590-0001, Price=None, SnapEDA_Link=https://www.snapeda.com/parts/47590-0001/Molex/view-part/47491/?ref=snap
P1: library part "Header 5", "Header, 5-Pin", LatestRevisionDate=17-Jul-2002, LatestRevisionNote="Re-released for DXP Platform.", Publisher="Altium Limited"
R1 R2 R3 R4 R5 R6 R7 R8 R9: "Resistor", LatestRevisionDate=17-Jul-2002, LatestRevisionNote="Re-released for DXP Platform.", PackageDescription="Axial Device, Thru-Hole; 2 Leads; 0.3 in Pin Spacing", PackageReference=AXIAL-0.3, Published=8-Jun-2000, Publisher="Altium Limited"
TB1: library part "Header 2", "Header, 2-Pin", LatestRevisionDate=17-Jul-2002, LatestRevisionNote="Re-released for DXP Platform.", Publisher="Altium Limited"
Y1: library part XTAL, "Crystal Oscillator", LatestRevisionDate=17-Jul-2002, LatestRevisionNote="Re-released for DXP Platform.", PackageDescription="Crystal, Thru-Hole; 2 Leads; Body 3.1 x 8.2 mm (Dia.xH)", PackageReference=R38, Published=8-Jun-2000, Publisher="Altium Limited"
L1: Code_IEC=1005, Code_JEITA=0402, LatestRevisionDate=29-May-2009, LatestRevisionNote="IPC-7351 Footprint Added.", PackageDescription="Chip Inductor", PackageReference=0402-A, Published=8-Jun-2000, Publisher="Altium Limited"

## Free pads (board coordinates)
  round 60 hole 86.61 unplated: 0(4275,2350) 0(4275,3800) 0(5250,3800) 0(5625,2350)

## Via types
v1: diameter 15, hole 8, Top Layer to Bottom Layer, 4 vias

## Nets (pads, with @x,y where several pads share a name; then routed paths per layer and width w, separated by ;. In a path a pad name is that pad's centre, name@x,y a point inside that pad or via, vN(x,y) a via of type N, cw(c..) or ccw(c..) an arc to the next point about the centre after c; other vN are vias at no path point)
3V: C2.1 C8.1 C9.1 C10.1 C11.1 C12.1 C13.1 C18.1 J1.1 L1.1 P1.2 R5.1 U1.D2 U1.F4 U1.F5 U1.F6 U1.F7 U2.4 U3.3
5V: C3.1 C6.1 C7.1 J2.1 P1.1 U2.3
AI1: H1.7 U1.F1
AI2: H1.8 U1.F2
AI3: H1.9 U1.E2
AI4: H1.10 U1.F3
CAN_N: D5.2 R8.1 TB1.2 U3.6 | length 684.2
  Top Layer w6.43: U3.6 5347.22,3166.33 5415.21,3166.33 R8.1 5422.94,3162.54 5489.4,3228.99 5489.4,3247.03 5499.96,3257.6 D5.2 5511.77,3257.6 5522.34,3268.16 5522.34,3275.52 5526.1,3279.29 5544.45,3279.29 5566.63,3301.46 5566.63,3469.25 5544.61,3491.27 5544.61,3616.23 5548.38,3620 TB1.2
CAN_P: D5.1 R8.2 TB1.1 U3.7 | length 636.7
  Top Layer w6.43: U3.7 5343.17,3229.46 R8.2 5422.94,3229.46 5432.52,3239.04 5432.52,3264.96 5499.96,3332.4 D5.1 5511.77,3332.4 5522.34,3321.84 5522.34,3314.48 5526.1,3310.72 5531.43,3310.72 5535.2,3314.48 5535.2,3456.23 5513.18,3478.25 5513.18,3616.23 5509.42,3620 TB1.1
CAN_RS: R9.1 U3.8
CANRX: U1.B4 U3.4
CANTX: U1.A4 U3.1
CE: R1.2 U2.1
DIO1: H1.1 U1.G4
DIO2: H1.2 U1.H4
DIO3: H1.3 U1.A2
DIO4: H1.4 U1.A1
DIO5: H1.5 U1.B1
DIO6: H1.6 U1.A3
GND: B1.3 B1.4 C1.2 C2.2 C3.2 C4.1 C5.1 C6.2 C7.2 C8.2 C9.2 C10.2 C11.2 C12.2 C13.2 C14.2 C15.2 C16.2 C17.1 C18.2 D3.2 D4.2 D5.3 J1.3 J1.5 J1.9 J2.4 J2.5 J2.SH1 J2.SH2 J2.SH3 J2.SH4 J2.SH5 P1.5 R1.1 R3.2 R4.2 R9.2 U1.C2 U1.E4 U1.E5 U1.E6 U1.E7 U1.G1 U1.H1 U2.2 U3.2
JNTRST: J1.10 U1.A6
JTDI: J1.8 U1.A8
JTDO: J1.6 U1.A7
LED1: D1.1 U1.G2
LED2: D2.1 U1.H2
NetC1_1: C1.1 U2.6
NetD1_2: D1.2 R3.1
NetD2_2: D2.2 R4.1
NRST: B1.1 B1.2 C16.1 R5.2 U1.E1
OSCIN: C4.2 R2.2 U1.C1 Y1.2
OSCOUT: C5.2 R2.1 U1.D1 Y1.1
SWCLK: J1.4 U1.A9
SWDIO: J1.2 U1.A10
USART2_RX: P1.4 U1.K2
USART2_TX: P1.3 U1.J2
USBD_N: D4.1 J2.2 R7.2
USBD_P: D3.1 J2.3 R6.2
USBDWSD_N: R7.1 U1.C10
  other v1: 4838.76,2777.56 5000,2900.65
USBDWSD_P: R6.1 U1.B10
  other v1: 4866.76,2777.56 5000,2872.65
VDDA: C14.1 C15.1 C17.2 L1.2 U1.J1 U1.K1
pads on no net: J1.7 U1.A5 U1.B2 U1.B3 U1.B5 U1.B6 U1.B7 U1.B8 U1.B9 U1.C3 U1.C4 U1.C5 U1.C6 U1.C7 U1.C8 U1.C9 U1.D3 U1.D4 U1.D5 U1.D6 U1.D7 U1.D8 U1.D9 U1.D10 U1.E3 U1.E8 U1.E9 U1.E10 U1.F8 U1.F9 U1.F10 U1.G3 U1.G5 U1.G6 U1.G7 U1.G8 U1.G9 U1.G10 U1.H3 U1.H5 U1.H6 U1.H7 U1.H8 U1.H9 U1.H10 U1.J3 U1.J4 U1.J5 U1.J6 U1.J7 U1.J8 U1.J9 U1.J10 U1.K3 U1.K4 U1.K5 U1.K6 U1.K7 U1.K8 U1.K9 U1.K10 U2.5 U2.7 U3.5

## Polygon pours and split planes (outlines as drawn)
GND on Top Layer "Bottom Layer-No Net" (solid, pour order 2): 4750,3230 4750,3360 4710,3360 4710,3430 4490,3430 4490,3650 5130,3650 5130,3430 4890,3430 4860,3400 4860,3360 4850,3350 4850,3300 4880,3300 4880,3230 4890,3230 4890,3390 4910,3410 5150,3410 5150,3670 4470,3670 4470,3410 4630,3410 4720,3320 4720,3280 4730,3280 4740,3270 4740,3230
no net on GND1 (split plane): 214 vertices, not listed, extent 4220.04,2295.04 5679.96,3854.96
no net on POWER1 (split plane): 214 vertices, not listed, extent 4220.04,2295.04 5679.96,3854.96
no net on POWER2 (split plane): 214 vertices, not listed, extent 4220.04,2295.04 5679.96,3854.96
no net on GND2 (split plane): 214 vertices, not listed, extent 4220.04,2295.04 5679.96,3854.96

## Text inside footprints (layer, text, board x,y; h text height)
J2: Mechanical 13 "PCB EDGE" at 5691.55,3092.83 h23.66 r90